# Altium PCB LD_panel_monitoring_module.PcbDoc
Units mm, origin at the board's own origin, x right, y up, seen from the top; angles counter-clockwise.
Board outline 55 x 59 mm, 4 copper layers (Top Layer, Layer 1 (GND), Layer 2 (PWR), Bottom Layer), stack 0.921 mm thick; 8 components, 0 nets, 8 pads, 0 vias.
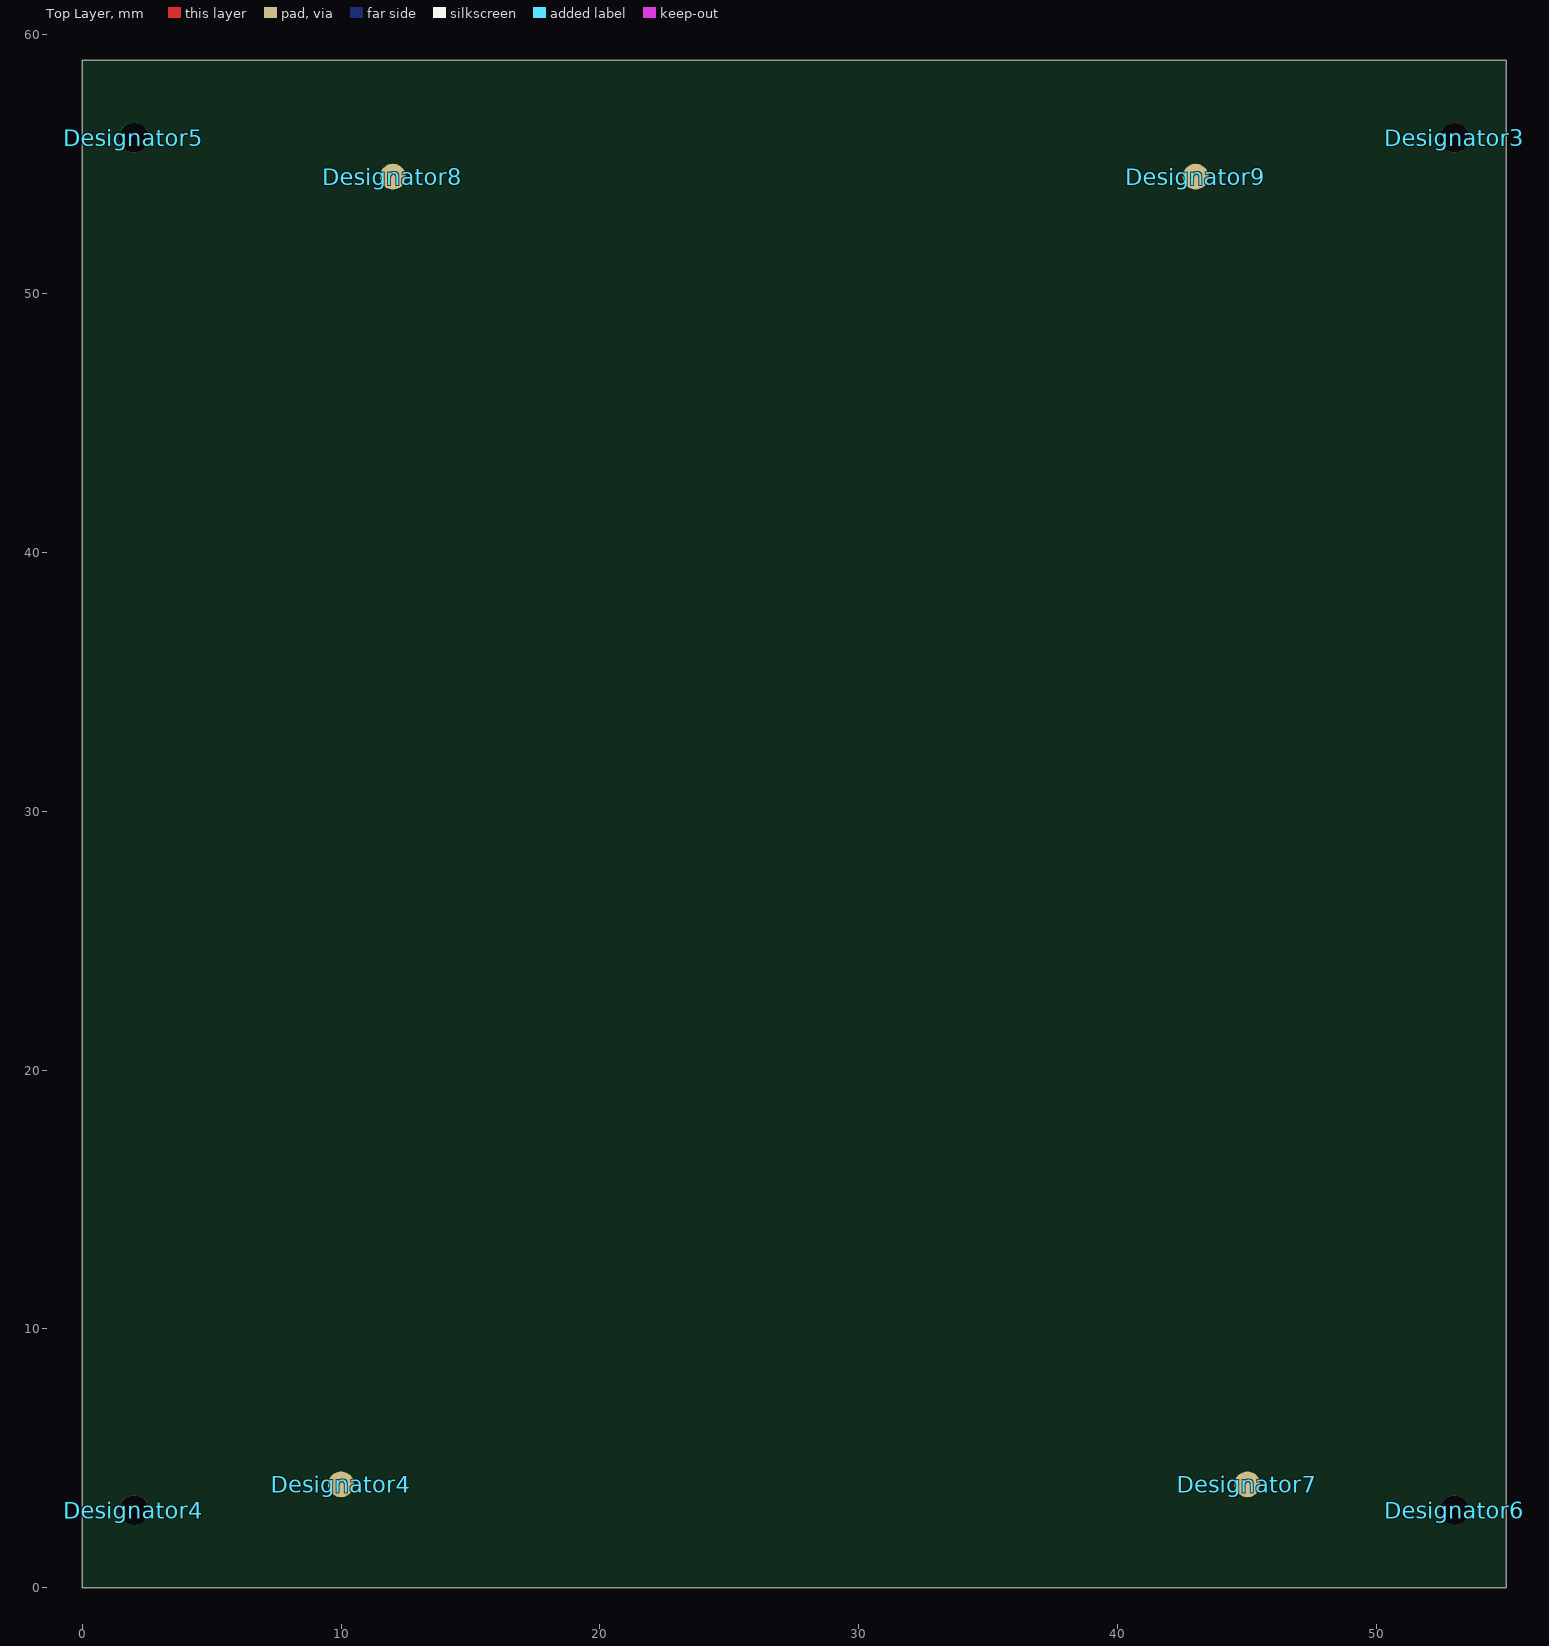
[diagram p0: Top Layer view]
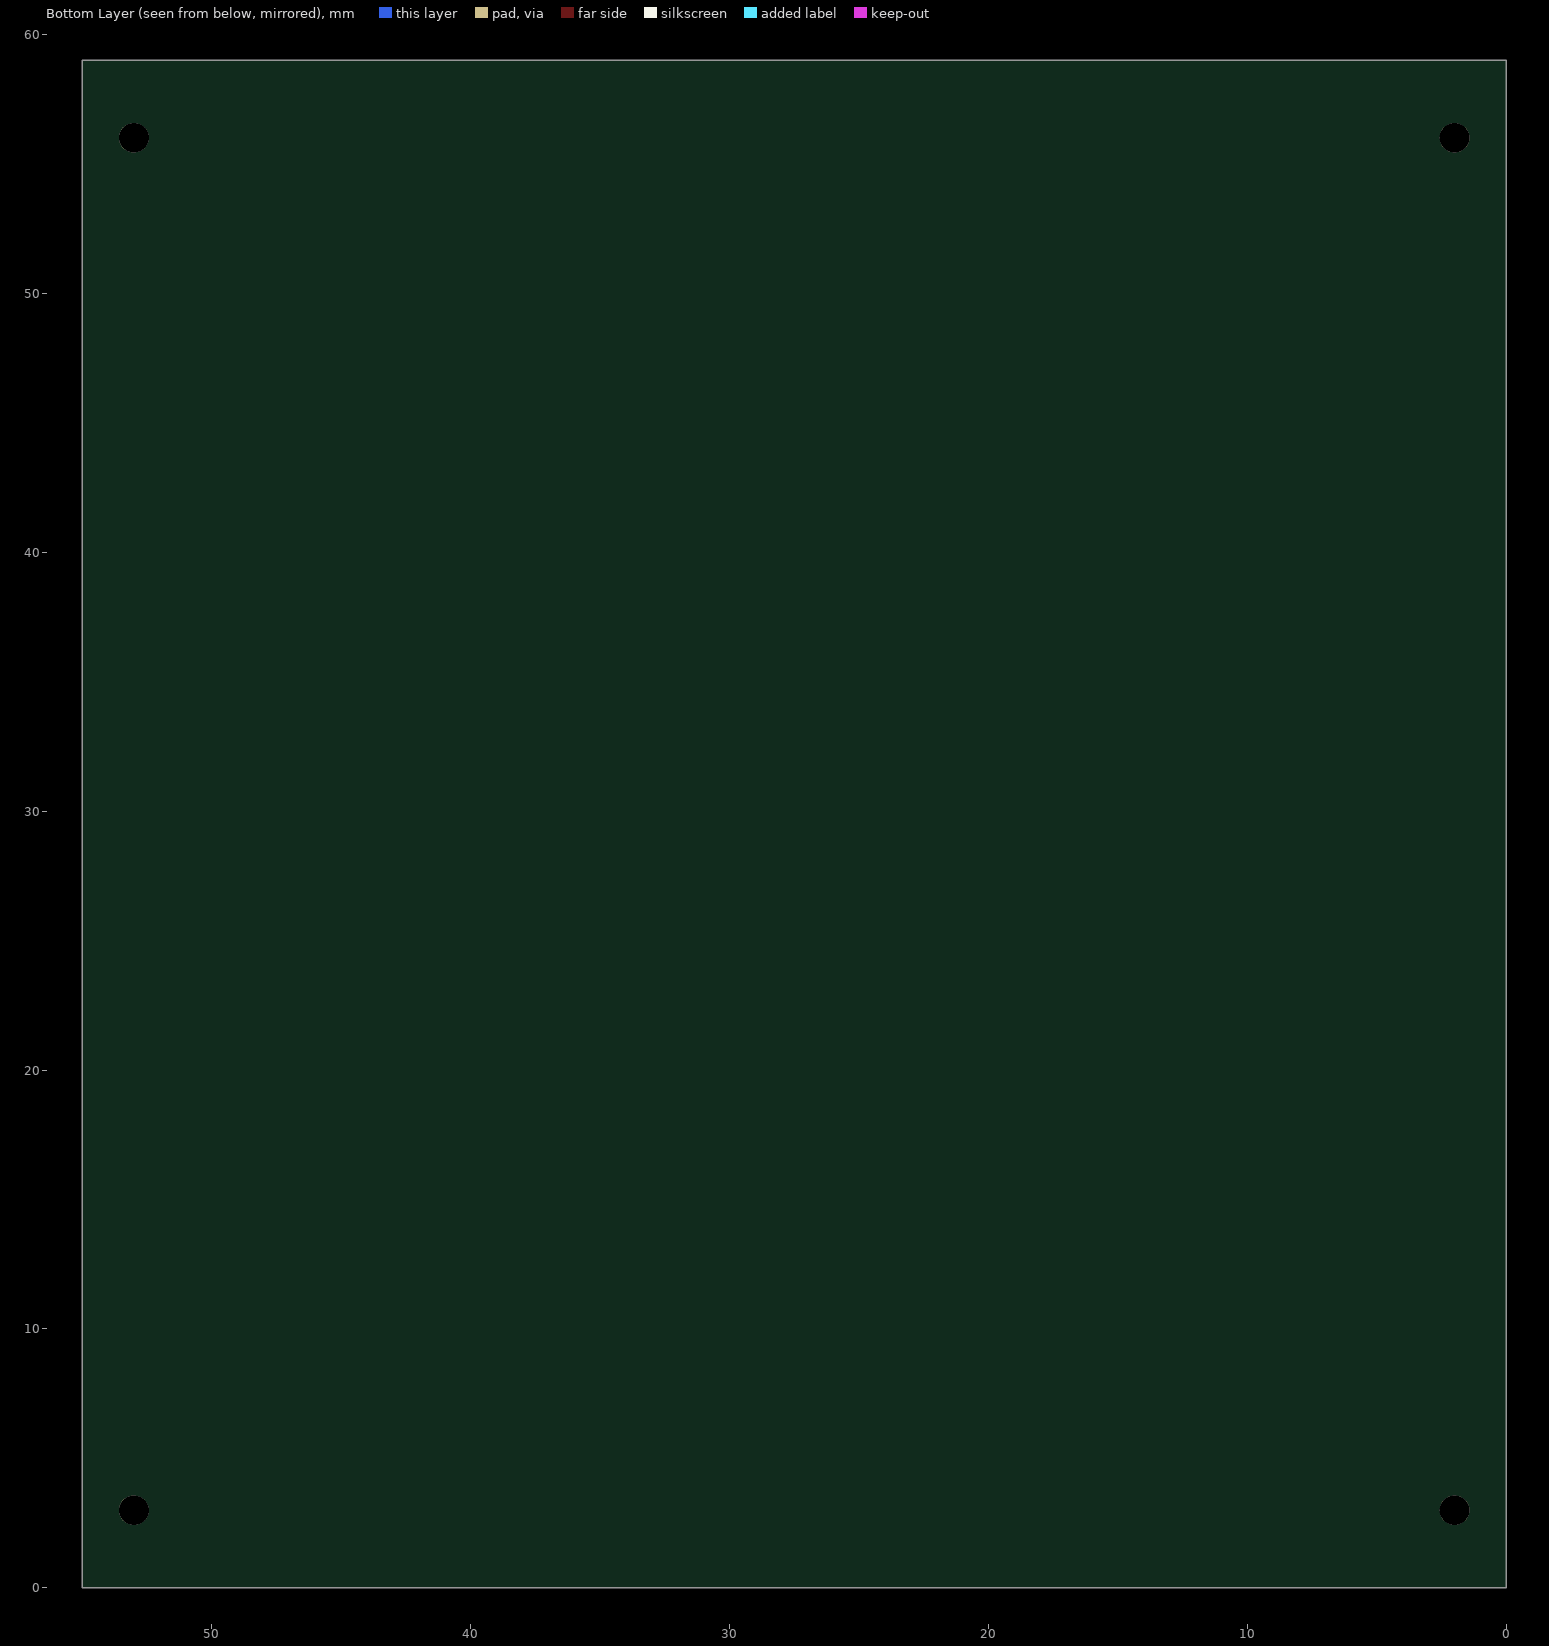
[diagram p1: Bottom Layer view, seen from below]

## Layer stack, top to bottom
Top Solder: solder mask 0.0127, Solder Resist, Dk 3.8
Top Layer: signal copper 0.035
Dielectric 1: prepreg 0.2104, 7628, Dk 4.5
Layer 1 (GND): signal copper 0.0152
Core: core 0.4, FR-4, Dk 4.5
Layer 2 (PWR): signal copper 0.0152
Dielectric 2: prepreg 0.2104, 7628, Dk 4.5
Bottom Layer: signal copper 0.035
Bottom Solder: solder mask 0.0127, Solder Resist, Dk 3.8

## Board outline
0,0 0,59 55,59 55,0

## Design rules (kind name [scope] priority, off if disabled: settings)
Clearance [All] p1: gap=0.254 ignorepadtopadclearanceinfootprint=FALSE except(0: Arc-Hole Track-Hole SMDPad-Hole THPad-Hole Via-Hole Fill-Hole Poly-Hole Region-Hole Text-Hole)
PolygonConnect [All] p1: connectstyle=Relief reliefconductorwidth=0.254 reliefentries=4 polygonreliefangle="90 Angle" airgapwidth=0.254
RoutingVias [All] p1: holewidth=0.711 width=1.27 viastyle="Through Hole" minholewidth=0.711 minwidth=1.27 maxholewidth=0.711 maxwidth=1.27
SolderMaskExpansion [All] p1: expansion=0.102 istentingtop=FALSE
Width [All] p1: maxlimit=0.254 minlimit=0.254 preferedwidth=0.254
30 further rules are at their usual default settings.

## Components (designator, comment, footprint, x,y, rotation, side; value= is the part's Value field where it differs from the comment)
Designator3 "Comment" Tooling_hole_JLCPCB 53,56 r0 top
Designator4 "Comment" Fiducial_JLCPCB 10,4 r0 top
Designator4 "Comment" Tooling_hole_JLCPCB 2,3 r0 top
Designator5 "Comment" Tooling_hole_JLCPCB 2,56 r0 top
Designator6 "Comment" Tooling_hole_JLCPCB 53,3 r0 top
Designator7 "Comment" Fiducial_JLCPCB 45,4 r0 top
Designator8 "Comment" Fiducial_JLCPCB 12,54.5 r0 top
Designator9 "Comment" Fiducial_JLCPCB 43,54.5 r0 top

## Footprints (in the part's own frame and the unit in brackets; to place one, negate y for a bottom-side part, rotate by r counter-clockwise, add the part's x,y. Pads: shape width x height; smd on the part's side, far side on the other; paste and mask are expansions set on the pad)
Fiducial_JLCPCB [mm]
  round 1 smd paste-2539.97 mask+0.5: 4(0,0)
Tooling_hole_JLCPCB [mm]
  round 1.152 hole 1.152 unplated paste-2539.97 mask+0.148: 4(0,0)

## Nets (pads, with @x,y where several pads share a name; then routed paths per layer and width w, separated by ;. In a path a pad name is that pad's centre, name@x,y a point inside that pad or via, vN(x,y) a via of type N, cw(c..) or ccw(c..) an arc to the next point about the centre after c; other vN are vias at no path point)
pads on no net: Designator3.4 Designator4.4 Designator5.4 Designator6.4 Designator7.4 Designator8.4 Designator9.4

## Silkscreen, mask and mechanical layers (free items; w line width, h text height)
Board:
  lines w0.1: 2.978,6 2.978,53 ; 3.989,6 3.989,53 ; 14.239,6 14.239,53 ; 16.25,6 16.25,53 ; 26.489,6 26.489,53 ; 28.5,6 28.5,53 ; 38.739,6 38.739,53 ; 40.75,6 40.75,53 ; 50.989,6 50.989,53 ; 52,6 52,53 ; 0,0 55,0 55,59 0,59 0,0
V Cut:
  lines w0.2: -1,6.525 56,6.525 ; -1,22.025 56,22.025 ; -1,37.375 56,37.375 ; -1,52.725 56,52.725
  text "V-CUT" at -11.35,51.7 h2
  text "V-CUT" at -11.35,36.35 h2
  text "V-CUT" at -11.35,21 h2
  text "V-CUT" at -11.35,5.5 h2
Route Tool Path:
  lines w1: 3.5,6 3.5,53.43 ; 51.5,5.75 51.5,52.976
  lines w2: 15.25,6 15.25,53.052 ; 27.5,6 27.5,53.052 ; 39.75,6 39.75,52.938
  text "CNC" at 0.3,59.3 h2
  text "CNC" at 12.3,59.3 h2
  text "CNC" at 25.3,59.3 h2
  text "CNC" at 37.3,59.3 h2
  text "CNC" at 48.3,59.3 h2

## Panel: embedded boards
"Hardware\ld_monitoring_decoupling.PcbDoc" at 3.989,6.991, 3 rows x 4 columns, spacing 15.35 x 12.25, rotation 0

## Text inside footprints (layer, text, board x,y; h text height)
Designator3: Board "Tooling hole" at 49.036,56.748 h0.8
Designator4: Board "Tooling hole" at -1.964,3.748 h0.8
Designator4: Board "Fiducial" at 7.941,4.735 h0.8
Designator5: Board "Tooling hole" at -1.964,56.748 h0.8
Designator6: Board "Tooling hole" at 49.036,3.748 h0.8
Designator7: Board "Fiducial" at 42.941,4.735 h0.8
Designator8: Board "Fiducial" at 9.941,55.235 h0.8
Designator9: Board "Fiducial" at 40.941,55.235 h0.8